# Altium PCB PCB_HW_.PcbDoc (part 2 of 2)
Units mm, origin at the board's own origin, x right, y up, seen from the top; angles counter-clockwise.
Board outline 140.28 x 161.54 mm, 2 copper layers (Top Layer, Bottom Layer); 173 components, 176 nets, 651 pads, 150 vias.
Unrouted connection lines stored in the file: 54.
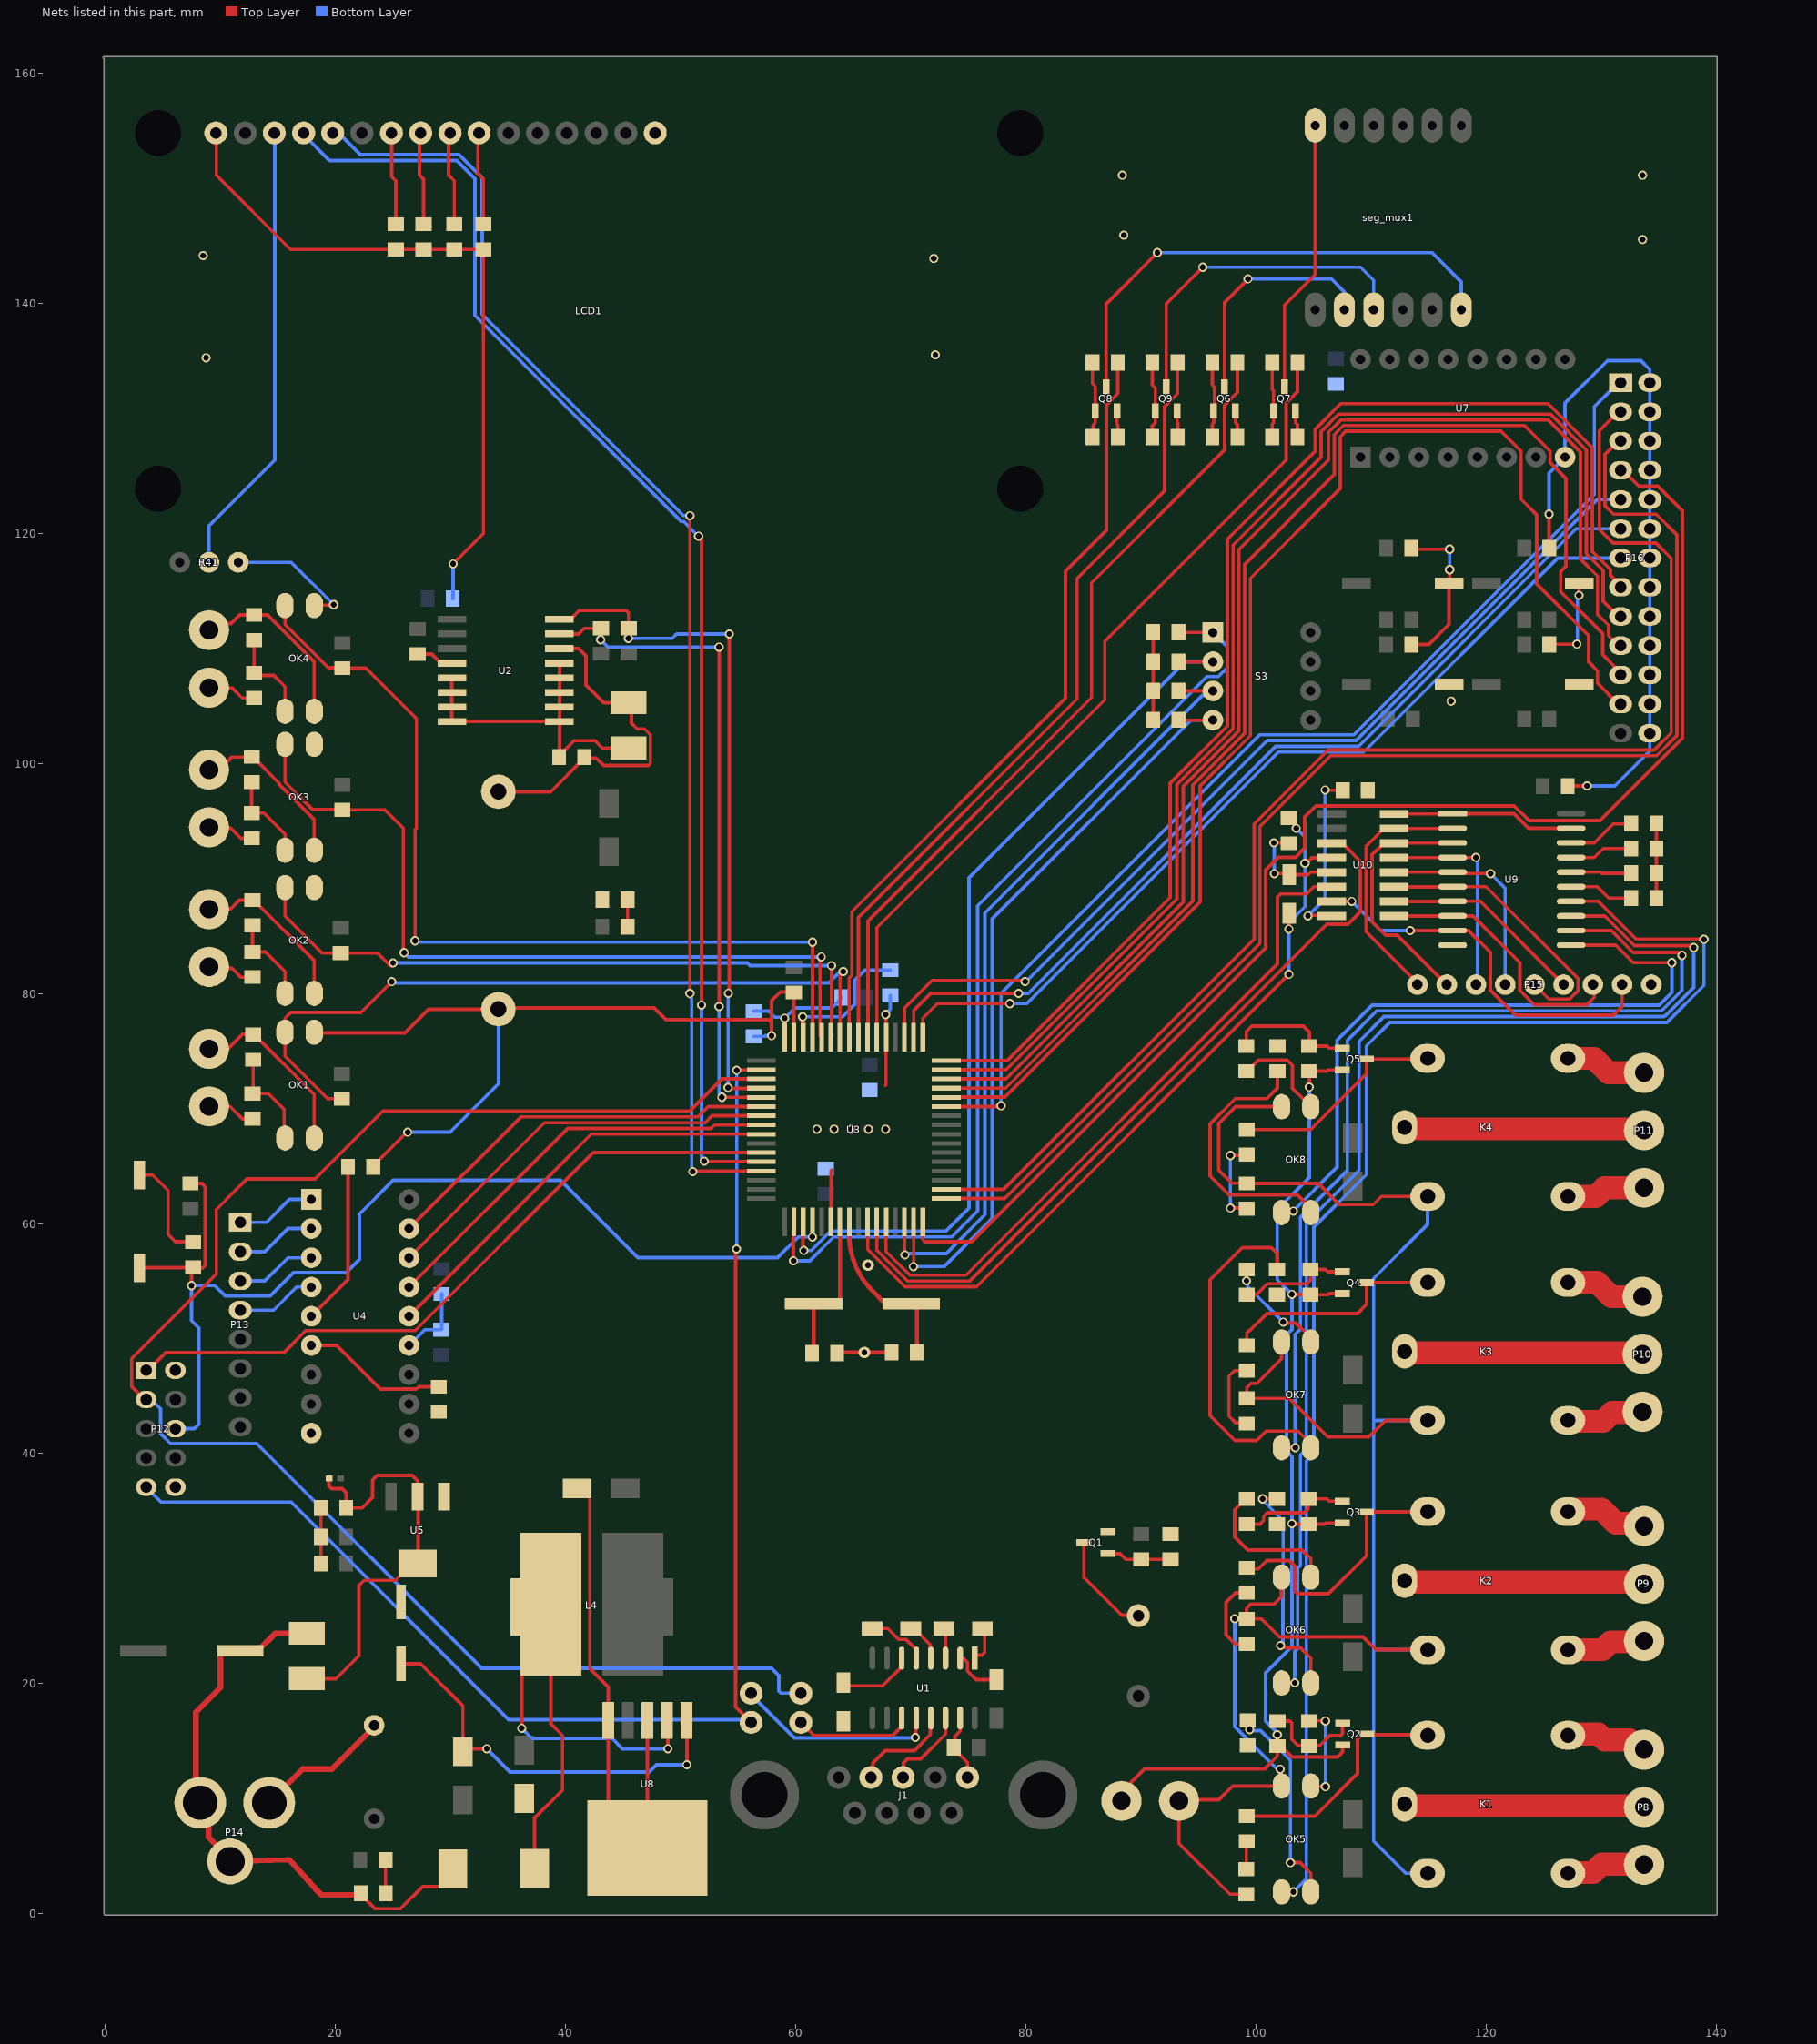
[diagram p2: the nets of this part, all layers, seen from the top]

## Via types
v1: diameter 0.8, hole 0.5, Top Layer to Bottom Layer, 146 vias
v2: diameter 1, hole 0.5, Top Layer to Bottom Layer, 4 vias

## Nets (pads, with @x,y where several pads share a name; then routed paths per layer and width w, separated by ;. In a path a pad name is that pad's centre, name@x,y a point inside that pad or via, vN(x,y) a via of type N, cw(c..) or ccw(c..) an arc to the next point about the centre after c; other vN are vias at no path point) (continued)
GND: BT1.2 C1.2 C5.1 C6.1 C7.2 C8.2 C9.1 C10.2 C11.2 C12.2 C13.2 C14.2 C15.1 C16.2 C17.2 C18.1 C19.1 C20.1 C21.1 C22.1 C23.2 C24.2 C25.2 C26.2 C27.2 C28.1 C29.1 C30.2 C31.2 C32.1 C33.1 D11.1 D13.1 D16.2 D18.1 J1.5 LCD1.1 LCD1.16 OK1.3 OK2.3 OK3.3 OK4.3 P12.2 P12.10 P14.1 P15.1 P16.2 P16.4 P16.6 P16.8 P16.10 P16.12 P16.14 P16.16 P16.18 P16.20 P16.22 P16.24 P16.26 pad.11 pad.12 pad.13 pad.14 pad.15 pad.16 pad.17 pad.18 pad.19 pad.20 pad.21 pad.22 pad.23 pad.24 Q1.2 Q6.2 Q7.2 Q8.2 Q9.2 R8.1 R26.1 R27.1 R30.1 R33.1 R35.1 R37.1 R38.1 R39.1 R40.1 R41.1 R46.1 R47.1 R48.1 R49.1 R52.1 R53.1 R59.1 R60.1 R61.2 S1.1 S2.1 S4.1 S5.1 S6.1 U1.15 U2.5 U2.6 U2.7 U2.8 U2.9 U2.10 U2.11 U2.12 U2.13 U3.22 U3.53 U3.63 U4.9 U4.13 U5.1 U7.8 U8.3 U8.5 U9.1 U9.10 U9.19 U10.8 U10.13 | length 437
  Top Layer w0.3: S1.1@2.972,64.211 4.115,64.211 5.461,62.865 5.461,59.055 6.096,58.42 7.62,58.42 C15.1@7.645,58.395 ; LCD1.1@9.616,154.806 9.652,154.77 9.652,151.13 16.104,144.678 R38.1@25.248,144.678 R39.1@27.661,144.678 R37.1@30.328,144.678 R40.1@32.868,144.678 32.868,119.99 v1(30.226,117.348) ; OK1.3@18.161,76.637 18.217,76.581 26.035,76.581 28.09,78.636 BT1.2@34.163,78.636 34.267,78.74 47.707,78.74 48.723,77.724 57.658,77.724 57.785,77.597 57.912,77.597 ; OK4.3@18.161,113.721 18.196,113.756 19.814,113.756 v1(19.849,113.792) ; C25.2@18.745,30.455 C26.2@18.745,32.766 C24.2@18.745,35.281 ; D16.2@22.073,1.651 22.227,1.651 23.428,0.45 25.659,0.45 27.571,2.362 29.101,2.362 30.201,3.462 D18.1@30.201,3.912 ; C10.2@23.292,64.922 23.292,65.022 26.214,67.945 v1(26.289,67.945) ; U2.5@30.121,107.442 U2.6@30.121,106.172 U2.7@30.121,104.902 U2.8@30.121,103.632 U2.9@39.475,103.632 ; C7.2@39.446,100.559 39.475,100.587 C7.2@39.475,100.687 ; U2.13@39.475,108.712 U2.12@39.475,107.442 U2.11@39.475,106.172 U2.10@39.475,104.902 U2.9@39.475,103.632 ; D13.1@41.021,36.957 41.421,36.957 42.121,36.257 42.121,21.305 43.717,19.709 U8.5@43.717,16.816 U8.3@43.717,8.128 ; C8.2@45.466,101.346 43.18,101.346 42.545,101.981 40.769,101.981 C7.2@39.475,100.687 ; U8.3@47.117,5.715 U8.3@47.117,16.816 ; v1(57.912,76.327) 57.912,77.597 ; U3.63@59.856,76.2 59.856,80.073 C14.2@59.842,80.086 59.792,80.137 58.674,80.137 57.912,79.375 57.912,77.597 ; U3.22@63.056,60.138 63.08,60.162 63.08,64.604 63.119,64.643 ; 67.818,72.009 67.856,72.047 U3.53@67.856,76.2 67.856,78.131 v1(67.818,78.168) ; U1.15@74.295,16.891 74.295,15.875 73.847,15.427 73.847,14.563 C1.2@73.736,14.453 73.736,14.353 74.93,13.159 74.93,11.859 J1.5@74.939,11.85 ; Q8.2@87.945,130.649 87.945,129.479 88.011,129.413 88.011,128.397 R59.1@87.986,128.372 ; R49.1@91.084,103.784 R48.1@91.084,106.324 R47.1@91.084,108.864 R46.1@91.084,111.404 ; Q9.2@93.152,130.649 93.152,129.606 93.218,129.54 93.218,128.397 R60.1@93.193,128.372 ; Q6.2@98.232,130.649 98.232,129.606 98.4,129.438 R52.1@98.4,128.372 ; v1(101.563,93.091) 102.845,93.091 R61.2@102.87,93.066 ; v1(101.6,90.424) 102.794,90.424 C27.2@102.895,90.322 104.546,90.322 104.775,90.551 106.586,90.551 U10.13@106.606,90.531 ; Q7.2@103.439,130.649 103.439,129.606 103.607,129.438 R53.1@103.607,128.372 ; U10.8@112.014,95.611 U9.1@117.094,95.611 ; C18.1@113.513,110.338 115.037,110.338 116.789,112.09 S5.1@116.789,115.646 116.84,115.697 v1(116.84,116.84) ; C20.1@113.513,118.72 113.614,118.618 v1(116.84,118.618) ; U9.1@117.094,95.631 122.428,95.631 123.698,94.361 U9.19@127.394,94.361 ; v1(125.476,121.666) 125.476,118.745 C21.1@125.501,118.72 ; C19.1@125.501,110.338 125.527,110.363 v1(127.889,110.363) ; C22.1@127.102,98.019 127.127,98.044 v1(128.778,98.044) ; v1(128.074,114.612) 128.074,115.628 S6.1@128.092,115.646 ; C7.2@39.475,100.687 U2.9@39.475,103.632
  Top Layer w0.381: C28.1@63.602,48.743 63.602,48.793 v2(65.977,48.793) C32.1@68.351,48.793
  Top Layer w0.5: C23.2@17.524,24.375 14.775,24.375 13.26,22.86 C31.2@11.76,22.86 10.26,22.86 10.01,22.61 10.01,19.662 7.874,17.526 7.874,10.033 P14.1@8.255,9.652 8.975,8.932 8.975,6.652 10.855,4.772 P14.1@10.855,4.552 15.772,4.692 15.779,4.693 15.993,4.693 16.148,4.537 18.415,2.032 18.796,1.651 D16.2@22.073,1.651
  Bottom Layer w0.3: R41.1@11.557,117.475 16.166,117.475 v1(19.849,113.792) ; v1(26.289,67.945) 29.972,67.945 34.163,72.136 BT1.2@34.163,78.636 ; U4.13@26.407,49.403 27.779,50.775 R35.1@29.185,50.775 29.235,50.825 C9.1@29.235,53.873 ; C6.1@30.201,114.325 30.226,114.351 v1(30.226,117.348) ; C16.2@56.363,76.276 57.353,76.276 57.404,76.327 v1(57.912,76.327) ; v1(67.818,78.168) 67.818,78.232 68.224,78.638 C17.2@68.224,79.832 ; v1(101.563,93.091) 101.6,93.054 v1(101.6,90.424) ; v1(116.84,116.84) v1(116.84,118.618) ; v1(125.476,121.666) 125.476,125.222 U7.8@126.873,126.619 126.873,131.318 130.556,135.001 133.477,135.001 134.239,134.239 P16.2@134.239,133.096 P16.4@134.239,130.556 P16.6@134.239,128.016 P16.8@134.239,125.476 P16.10@134.239,122.936 P16.12@134.239,120.396 P16.14@134.239,117.856 P16.16@134.239,115.316 P16.18@134.239,112.776 P16.20@134.239,110.236 P16.22@134.239,107.696 P16.24@134.239,105.156 P16.26@134.239,102.616 134.239,101.092 131.191,98.044 v1(128.778,98.044) ; v1(127.889,110.363) 127.949,110.423 127.949,114.487 v1(128.074,114.612)
  other v2: 66.294,56.388
GNDX: P7.1 Q2.2 Q3.2 Q4.2 Q5.2 R28.1 R29.1 R32.1 R34.1 | length 97.2
  Top Layer w0.3: P7.1@88.318,9.812 88.318,10.594 90.297,12.573 100.734,12.573 101.854,13.693 R28.1@101.854,14.548 ; v1(101.854,15.558) R28.1@101.854,14.548 ; v1(103.129,33.909) 103.16,33.878 R29.1@104.589,33.878 104.603,33.864 105.934,33.864 106.045,33.975 Q3.2@107.501,33.975 ; v1(103.129,53.848) 104.718,53.848 R32.1@104.75,53.817 106.268,53.817 106.365,53.914 Q4.2@107.501,53.914 ; v1(104.638,71.853) 104.638,73.232 R34.1@104.623,73.248 106.141,73.248 106.238,73.345 Q5.2@107.501,73.345 ; Q2.2@107.535,14.671 107.535,14.063 107.096,13.624 103.128,13.624 102.203,14.548 R28.1@101.854,14.548
  Bottom Layer w0.3: v1(101.854,15.558) 101.758,15.654 101.758,15.844 100.838,16.764 100.838,20.955 103.129,23.246 v1(103.129,33.909) 103.129,39.749 102.675,40.202 102.675,50.34 103.129,50.794 v1(103.129,53.848) 101.854,55.123 101.854,61.214 104.638,63.998 v1(104.638,71.853)
IN_1: OK4.4 R12.2 U3.61 | length 78.6
  Top Layer w0.3: OK4.4@15.621,113.721 15.621,112.086 19.376,108.331 20.549,108.331 R12.2@20.599,108.28 22.657,108.28 27.051,103.886 27.051,94.365 26.924,94.238 v1(26.924,84.582) ; U3.61@61.456,76.2 61.456,84.443 v1(61.468,84.455)
  Bottom Layer w0.3: v1@26.924,84.455 v1(61.468,84.455)
IN_2: OK3.4 R9.2 U3.60 | length 69.6
  Top Layer w0.3: OK3.4@15.621,101.656 15.621,98.37 17.979,96.012 20.549,96.012 R9.2@20.599,95.961 24.308,95.961 25.908,94.361 25.908,83.611 v1(25.971,83.548) ; v1(62.23,83.185) 62.115,83.07 62.115,76.341 U3.60@62.256,76.2
  Bottom Layer w0.3: v1(25.971,83.548) 26.334,83.185 v1(62.23,83.185)
IN_3: OK2.4 R4.2 U3.59 | length 58.3
  Top Layer w0.3: OK2.4@15.621,89.21 15.621,86.741 18.847,83.515 R4.2@20.472,83.515 23.673,83.515 24.754,82.434 24.923,82.434 25.019,82.53 v1(25.019,82.665) ; U3.59@63.056,76.2 63.119,76.263 v1(63.119,82.423)
  Bottom Layer w0.3: v1(25.019,82.665) 55.81,82.665 56.052,82.423 v1(63.119,82.423)
IN_4: OK1.4 R1.2 U3.58 | length 65.9
  Top Layer w0.3: R1.2@20.574,70.841 20.549,70.866 19.304,70.866 15.621,74.549 OK1.4@15.621,76.637 15.621,77.851 16.129,78.359 22.225,78.359 v1(24.892,81.026) ; U3.58@63.856,76.2 63.863,76.207 63.863,81.643 v1(64.135,81.915)
  Bottom Layer w0.3: v1(24.892,81.026) 25.007,80.911 62.877,80.911 63.881,81.915 v1(64.135,81.915)
"K A": U3.6 U4.17 | length 35
  Top Layer w0.3: U4.17@26.407,59.563 36.113,69.269 51.489,69.269 52.389,70.169 U3.6@57.025,70.169
"K B": U3.7 U4.16 | length 35.7
  Top Layer w0.3: U4.16@26.407,57.023 38.153,68.769 52.132,68.769 52.732,69.369 U3.7@57.025,69.369
"K C": U3.8 U4.15 | length 36.5
  Top Layer w0.3: U4.15@26.407,54.483 40.193,68.269 52.648,68.269 52.948,68.569 U3.8@57.025,68.569
"K D": U3.9 U4.14 | length 37.2
  Top Layer w0.3: U4.14@26.407,51.943 39.014,64.55 42.233,67.769 U3.9@57.025,67.769
MISO: P2.1 P12.3 U3.3 | length 141.8
  Top Layer w0.3: P12.3@3.556,44.704 3.406,44.704 2.306,45.804 2.306,48.28 9.652,55.626 9.652,61.214 11.303,62.865 11.303,62.87 12.314,63.881 18.233,63.881 24.121,69.769 50.801,69.769 53.601,72.569 U3.3@57.025,72.569
  Bottom Layer w0.3: P12.3@3.556,44.704 3.989,44.704 4.806,43.887 4.806,41.748 5.66,40.894 13.163,40.894 32.721,21.336 57.912,21.336 58.547,20.701 58.547,19.353 58.723,19.177 P2.1@60.452,19.177
MOSI: P3.2 P12.9 U3.2 | length 120.5
  Top Layer w0.3: v1(54.864,57.785) 54.784,57.705 54.784,17.987 P3.2@56.134,16.637 ; v1(54.878,73.319) 54.903,73.344 57,73.344 U3.2@57.025,73.369
  Bottom Layer w0.3: P12.9@3.556,37.084 4.852,35.788 16.155,35.788 35.064,16.879 55.892,16.879 P3.2@56.134,16.637 ; v1(54.864,57.785) 54.878,57.799 v1(54.878,73.319)
NetBT1_1: BT1.1 C7.1 C8.1 U2.14 | length 30.8
  Top Layer w0.3: BT1.1@34.163,97.536 38.708,97.536 41.631,100.459 C7.1@41.631,100.559 41.732,100.457 42.672,100.457 43.307,99.822 47.195,99.822 47.371,99.998 47.371,102.486 46.859,102.998 46.227,102.998 45.72,103.505 45.72,105.029 C8.1@45.466,105.283 43.307,105.283 41.783,106.807 41.783,109.347 41.148,109.982 U2.14@39.475,109.982
NetC2_1: C2.1 U1.2 | length 4.4
  Top Layer w0.3: U1.2@74.295,22.218 74.302,22.225 74.549,22.225 74.93,21.844 74.93,21.108 75.693,20.345 C2.1@77.445,20.345
NetC3_1: C3.1 U1.1 | length 3.3
  Top Layer w0.3: U1.1@75.565,22.218 75.565,22.379 75.665,22.479 76.2,22.479 76.431,22.71 76.431,24.585 C3.1@76.225,24.79
NetC3_2: C3.2 U1.3 | length 2.6
  Top Layer w0.3: C3.2@72.873,24.79 73.025,24.638 U1.3@73.025,22.218
NetC4_1: C4.1 U1.4 | length 3.5
  Top Layer w0.3: C4.1@70.002,24.79 70.302,24.79 71.717,23.376 71.717,22.256 U1.4@71.755,22.218
NetC4_2: C4.2 U1.5 | length 5.3
  Top Layer w0.3: C4.2@66.65,24.79 68.007,24.79 68.957,23.84 69.613,23.84 70.485,22.968 U1.5@70.485,22.218
NetC5_2: C5.2 U1.6 | length 6.6
  Top Layer w0.3: C5.2@64.16,20.091 64.44,19.812 67.559,19.812 69.215,21.468 U1.6@69.215,22.218
NetC10_1: C10.1 U4.5 | length 14.3
  Top Layer w0.3: U4.5@17.907,51.943 21.107,55.143 C10.1@21.107,64.922
NetC11_1: C11.1 U4.6 | length 12.7
  Top Layer w0.3: U4.6@17.907,49.403 20.111,49.403 23.901,45.613 27.056,45.613 27.265,45.822 C11.1@28.981,45.822
NetC16_1: C16.1 L2.2 U3.64 | length 10.3
  Top Layer w0.3: U3.64@59.056,76.2 v1(59.055,77.851)
  Bottom Layer w0.3: C16.1@56.363,78.461 57.683,78.461 58.205,77.939 58.967,77.939 v1(59.055,77.851) 59.944,78.74 63.143,78.74 63.957,79.554 L2.2@63.957,79.654
NetC17_1: C17.1 U3.62 | length 12.3
  Top Layer w0.3: v1(60.606,77.978) 60.631,77.953 60.631,76.225 U3.62@60.656,76.2
  Bottom Layer w0.3: v1(60.606,77.978) 64.076,77.978 65.151,79.053 65.151,81.153 66.015,82.017 C17.1@68.224,82.017
NetC23_1: C23.1 C24.1 L3.1 U5.2 | length 36.7
  Top Layer w0.3: C23.1@17.524,20.438 20.057,20.438 22.045,22.426 22.045,28.522 22.507,28.984 25.23,28.984 26.697,30.451 U5.2@27.147,30.451 27.178,30.482 27.178,36.22 U5.2@27.147,36.251 27.147,37.623 26.67,38.1 23.622,38.1 23.241,37.719 23.241,36.195 22.327,35.281 C24.1@20.93,35.281 20.93,36.601 20.574,36.957 19.685,36.957 19.447,37.195 L3.1@19.447,37.846
NetC28_2: C28.2 U3.23 Y1.1 | length 13.5
  Top Layer w0.381: C28.2@61.417,48.743 ccw(c61.049,49.111) 61.57,49.111 Y1.1@61.57,53.035 63.546,53.035 63.856,53.345 U3.23@63.856,60.138
NetC30_1: C30.1 D17.2 U8.1 | length 35.4
  Top Layer w0.3: C30.1@25.705,21.742 27.407,21.742 31.09,18.059 D17.2@31.09,14.097 31.34,14.347 v1(33.161,14.347) ; U8.1@50.517,16.816 50.546,16.787 v1(50.546,12.954)
  Bottom Layer w0.3: v1(33.161,14.347) 35.177,12.331 47.281,12.331 47.904,12.954 v1(50.546,12.954)
NetC32_2: C32.2 U3.24 Y1.2 | length 14.8
  Top Layer w0.381: U3.24@64.656,60.138 64.656,59.055 ccw(c71.606,59.055) 66.692,54.141 67.635,53.198 67.746,53.086 69.467,53.086 69.469,53.086 cw(c69.469,52.69) 69.493,53.085 cw(c69.469,52.69) 69.545,53.079 69.568,53.074 Y1.2@69.763,53.155 ; Y1.2@70.053,53.035 70.536,53.035 C32.2@70.536,48.793
NetD1_A: R15.1
NetD2_2: D2.2 R19.2 | length 2.4
  Top Layer w0.3: D2.2@99.162,3.886 99.162,6.248 R19.2@99.212,6.299
NetD3_2: D3.2 R20.2 | length 7.1
  Top Layer w0.3: D3.2@99.212,23.444 98.222,23.444 97.409,24.257 97.409,27.065 98.234,27.889 R20.2@99.212,27.889
NetD4_2: D4.2 R21.2 | length 7
  Top Layer w0.3: D4.2@99.212,42.621 99.153,42.681 98.238,42.681 97.663,43.256 97.663,46.736 98.146,47.219 R21.2@99.212,47.219
NetD5_A: K1.5 Q2.3 R19.1 | length 20.5
  Top Layer w0.3: R19.1@99.212,8.484 105.131,8.484 108.839,12.192 108.839,15.175 109.285,15.621 Q2.3@109.635,15.621 109.685,15.571 114.877,15.571 K1.5@114.927,15.521
NetD6_A: K2.5 Q3.3 R20.1 | length 23.7
  Top Layer w0.3: R20.1@99.212,30.074 99.314,29.972 100.203,29.972 100.947,30.716 102.886,30.716 103.094,30.508 103.096,30.508 103.378,30.226 103.378,28.067 103.629,27.816 106.302,27.816 109.601,31.115 Q3.3@109.601,34.925 109.615,34.939 114.914,34.939 K2.5@114.927,34.952
NetD7_2: D7.2 R24.2 | length 7.5
  Top Layer w0.3: v1(97.79,61.341) 99.162,61.341 D7.2@99.212,61.29 ; v1(97.79,65.913) 99.136,65.913 R24.2@99.212,65.989
  Bottom Layer w0.3: v1(97.79,61.341) v1(97.79,65.913)
NetD8_A: K3.5 Q4.3 R21.1 | length 19.7
  Top Layer w0.3: R21.1@99.212,49.403 99.212,50.497 99.388,50.673 99.441,50.673 100.953,52.185 108.827,52.185 109.601,52.959 Q4.3@109.601,54.864 109.615,54.878 114.914,54.878 K3.5@114.927,54.891
NetD9_A: K4.5 Q5.3 R24.1 | length 19
  Top Layer w0.3: R24.1@99.212,68.174 104.75,68.174 109.601,73.025 Q5.3@109.601,74.295 114.865,74.295 K4.5@114.927,74.357
NetD10_1: D10.1 U9.18 | length 5.9
  Top Layer w0.3: U9.18@127.394,93.091 129.413,93.091 131.064,94.742 132.588,94.742 D10.1@132.613,94.767
NetD10_2: D10.2 D12.2 D14.2 D15.2 | length 6.5
  Top Layer w0.3: D15.2@134.798,88.29 D14.2@134.798,90.449 D12.2@134.798,92.608 D10.2@134.798,94.767
NetD12_1: D12.1 U9.17 | length 5.6
  Top Layer w0.3: U9.17@127.432,91.783 U9.17@127.394,91.821 129.413,91.821 130.2,92.608 D12.1@132.613,92.608
NetD14_1: D14.1 U9.16 | length 5.3
  Top Layer w0.3: U9.16@127.394,90.551 129.946,90.551 130.048,90.449 D14.1@132.613,90.449
NetD15_1: D15.1 U9.15 | length 5.6
  Top Layer w0.3: U9.15@127.394,89.281 129.667,89.281 130.658,88.29 D15.1@132.613,88.29
NetD16_1: D16.1 R54.1 | length 2.9
  Top Layer w0.3: R54.1@24.359,4.674 24.359,1.803 D16.1@24.384,1.778
NetD18_2: D18.2 L4.1 U8.2 | length 50.9
  Top Layer w0.3: v1(36.195,16.129) L4.1@36.195,26.67 ; D18.2@37.313,3.937 37.313,8.327 39.739,10.753 39.739,15.506 38.735,16.51 L4.1@38.735,26.924 ; U8.2@48.817,16.816 48.895,16.738 v1(48.895,14.351)
  Bottom Layer w0.3: v1(36.195,16.129) 37.096,15.228 44.073,15.228 44.95,14.351 v1(48.895,14.351)
NetJ1_2: J1.2 U1.13 | length 8.8
  Top Layer w0.3: J1.2@66.539,11.85 66.717,12.028 66.717,13.123 67.783,14.189 70.323,14.189 71.717,15.583 71.717,16.98 U1.13@71.755,17.018
NetJ1_3: J1.3 U1.14 | length 7.4
  Top Layer w0.3: J1.3@69.339,11.85 69.385,11.896 69.385,13.124 69.723,13.462 70.866,13.462 73.025,15.621 U1.14@73.025,17.018
NetK1_1: K1.1 P8.2 | length 20.9
  Top Layer w2: K1.1@112.927,9.521 112.927,9.488 113.019,9.396 133.606,9.396 P8.2@133.731,9.271
NetK1_2: K1.2 P8.1 | length 6.8
  Top Layer w2: K1.2@127.127,15.521 127.223,15.617 127.826,15.617 127.831,15.621 129.794,15.621 130.302,15.113 132.483,15.113 133.038,14.558 P8.1@133.444,14.558
NetK1_3: K1.3 P8.3 | length 7
  Top Layer w2: K1.3@127.127,3.521 127.195,3.589 129.319,3.589 130.048,4.318 133.278,4.318 133.325,4.271 P8.3@133.731,4.271
NetK2_1: K2.1 P9.2 | length 20.9
  Top Layer w2: K2.1@112.927,28.952 112.927,28.919 113.019,28.827 133.606,28.827 P9.2@133.731,28.702
NetK2_2: K2.2 P9.1 | length 7.3
  Top Layer w2: K2.2@127.127,34.952 127.223,35.048 127.826,35.048 127.958,35.179 130.048,35.179 131.269,33.958 133.475,33.958 P9.1@133.731,33.702
NetK2_3: K2.3 P9.3 | length 6.9
  Top Layer w2: K2.3@127.127,22.952 130.14,22.952 130.825,23.637 133.666,23.637 P9.3@133.731,23.702
NetK3_1: K3.1 P10.2 | length 20.8
  Top Layer w2: K3.1@112.927,48.891 112.927,48.858 113.019,48.766 133.479,48.766 P10.2@133.604,48.641
NetK3_2: K3.2 P10.1 | length 7
  Top Layer w2: K3.2@127.127,54.891 129.64,54.891 130.888,53.643 133.602,53.643 P10.1@133.604,53.641
NetK3_3: K3.3 P10.3 | length 6.9
  Top Layer w2: K3.3@127.127,42.891 127.219,42.799 130.175,42.799 130.952,43.576 133.539,43.576 P10.3@133.604,43.641
NetK4_1: K4.1 P11.2 | length 20.9
  Top Layer w2: K4.1@112.927,68.357 112.927,68.324 113.019,68.232 133.606,68.232 P11.2@133.731,68.107
NetK4_2: K4.2 P11.1 | length 7.1
  Top Layer w2: K4.2@127.127,74.357 127.131,74.361 129.391,74.361 130.645,73.107 P11.1@133.731,73.107
NetK4_3: K4.3 P11.3 | length 6.9
  Top Layer w2: K4.3@127.127,62.357 129.54,62.357 130.29,63.107 P11.3@133.731,63.107
NetL1_1: L1.1 R15.2 | length 2.4
  Top Layer w0.3: L1.1@45.39,85.813 45.39,88.161 R15.2@45.39,88.163 R15.2@45.39,88.163
NetLCD1_3: LCD1.3 R41.3 | length 39.7
  Bottom Layer w0.3: R41.3@9.017,117.475 9.017,120.65 14.732,126.365 14.732,154.765 LCD1.3@14.691,154.806
NetLCD1_7: LCD1.7 R38.2 | length 8.1
  Top Layer w0.3: LCD1.7@24.866,154.806 24.892,154.78 24.892,151.003 25.248,150.647 R38.2@25.248,146.863
NetLCD1_8: LCD1.8 R39.2 | length 8.1
  Top Layer w0.3: LCD1.8@27.416,154.806 27.305,154.695 27.305,151.13 27.661,150.774 R39.2@27.661,146.863
NetLCD1_9: LCD1.9 R37.2 | length 8.2
  Top Layer w0.3: LCD1.9@29.966,154.806 29.845,154.685 29.845,151.13 30.328,150.647 R37.2@30.328,146.863
NetLCD1_10: LCD1.10 R40.2 | length 8.2
  Top Layer w0.3: LCD1.10@32.491,154.806 32.385,154.7 32.385,151.257 32.868,150.774 R40.2@32.868,146.863
NetLS1_2: LS1.2 Q1.3 | length 9.1
  Top Layer w0.3: Q1.3@85.056,32.258 85.056,29.244 88.339,25.961 89.736,25.961 LS1.2@89.789,25.908
NetOK1_1: OK1.1 R2.2 R3.2 | length 8.8
  Top Layer w0.3: R3.2@12.852,74.244 12.852,71.349 R2.2@12.802,71.298 14.173,71.298 15.546,69.925 15.546,67.512 OK1.1@15.621,67.437
NetOK1_2: OK1.2 P1.1 R3.1 | length 15.6
  Top Layer w0.3: P1.1@9.017,75.184 10.668,75.184 11.938,76.454 12.927,76.454 18.161,71.22 OK1.2@18.161,67.437
NetOK2_1: OK2.1 R5.2 R7.2 | length 7.7
  Top Layer w0.3: R7.2@12.802,85.928 R5.2@12.802,83.617 13.919,83.617 15.621,81.915 OK2.1@15.621,80.01
NetOK2_2: OK2.2 P4.1 R7.1 | length 14.5
  Top Layer w0.3: P4.1@9.017,87.316 9.077,87.376 10.922,87.376 11.659,88.113 R7.1@12.802,88.113 12.902,88.113 18.161,82.853 OK2.2@18.161,80.01
NetOK3_1: OK3.1 R10.2 R11.2 | length 7.7
  Top Layer w0.3: R11.2@12.725,98.374 R10.2@12.725,95.682 13.792,95.682 15.621,93.853 OK3.1@15.621,92.456
NetOK3_2: OK3.2 P5.1 R11.1 | length 14.6
  Top Layer w0.3: P5.1@9.017,99.448 9.883,99.448 10.892,100.457 10.922,100.457 11.024,100.559 R11.1@12.725,100.559 12.825,100.559 15.121,98.263 15.121,98.163 18.161,95.123 OK3.2@18.161,92.456
NetOK4_1: OK4.1 R13.2 R14.2 | length 8.2
  Top Layer w0.3: R14.2@12.929,110.719 R13.2@12.929,107.874 13.166,107.636 14.665,107.636 15.621,106.68 OK4.1@15.621,104.521
NetOK4_2: OK4.2 P6.1 R14.1 | length 15.7
  Top Layer w0.3: P6.1@9.017,111.58 9.601,112.163 10.944,112.163 11.684,112.903 14.097,112.903 14.223,112.777 18.161,108.839 OK4.2@18.161,104.521
NetOK5_2: OK5.2 R26.2 | length 18.2
  Top Layer w0.3: R26.2@99.289,16.815 99.463,16.64 v1(99.463,16.024) ; v1(102.997,4.445) 103.858,4.445 104.775,3.528 OK5.2@104.775,1.905
  Bottom Layer w0.3: v1(99.463,16.024) 99.559,15.929 100.403,15.929 102.997,13.335 v1(102.997,4.445)
NetOK5_3: OK5.3 R22.1 | length 8.4
  Top Layer w0.3: R22.1@104.64,16.758 104.646,16.764 v1(106.045,16.764) ; OK5.3@104.775,11.105 104.803,11.077 106.017,11.077 v1(106.045,11.049)
  Bottom Layer w0.3: v1(106.045,11.049) v1(106.045,16.764)
NetOK6_2: OK6.2 R27.2 | length 20.1
  Top Layer w0.3: v1(100.584,36.068) 101.823,36.068 R27.2@101.829,36.062 ; v1(102.138,23.315) 102.273,23.315 102.443,23.145 102.712,23.145 102.743,23.114 103.886,23.114 104.775,22.225 OK6.2@104.775,20.066
  Bottom Layer w0.3: v1(100.584,36.068) 100.584,35.941 102.362,34.163 102.362,28.795 102.357,28.79 102.357,23.423 102.25,23.315 v1(102.138,23.315)
NetOK6_3: OK6.3 R23.1 | length 12.8
  Top Layer w0.3: R23.1@99.212,36.062 99.112,36.062 98.162,35.112 98.162,32.775 99.314,31.623 104.013,31.623 104.775,30.861 OK6.3@104.775,29.266
NetOK7_2: OK7.2 R30.2 | length 31.2
  Top Layer w0.3: R30.2@101.829,56.001 101.829,57.429 101.472,57.786 101.346,57.912 98.806,57.912 96.012,55.118 96.012,43.307 98.171,41.148 100.076,41.148 100.891,41.963 103.675,41.963 104.775,40.863 OK7.2@104.775,40.513
NetOK7_3: OK7.3 R25.1 | length 9.2
  Top Layer w0.3: v1(99.187,55.017) 99.187,55.976 R25.1@99.212,56.001 ; v1(102.379,51.435) 102.474,51.339 103.499,51.339 104.775,50.063 OK7.3@104.775,49.713
  Bottom Layer w0.3: v1(99.187,55.017) 99.283,54.921 99.283,54.531 v1(102.379,51.435)
NetOK8_2: OK8.2 R33.2 | length 23.5
  Top Layer w0.3: R33.2@101.779,73.248 R33.2@101.879,73.248 101.879,71.78 100.954,70.855 98.214,70.855 96.012,68.652 96.012,64.135 97.663,62.484 103.601,62.484 104.775,61.31 OK8.2@104.775,60.96
NetOK8_3: OK8.3 R31.1 | length 8.9
  Top Layer w0.3: R31.1@99.162,73.248 99.262,73.248 100.212,74.198 102.724,74.198 103.18,73.742 103.18,71.755 104.195,70.74 104.221,70.74 104.775,70.185 OK8.3@104.775,70.16
NetP1_2: P1.2 R2.1 | length 4.2
  Top Layer w0.3: P1.2@9.017,70.184 10.842,70.184 11.938,69.088 12.776,69.088 R2.1@12.802,69.113
NetP2_2: P2.2 U1.11 | length 10.3
  Top Layer w0.3: P2.2@60.452,16.637 61.6,15.489 68.436,15.489 69.215,16.268 U1.11@69.215,17.018
NetP3_1: P3.1 U1.12 | length 17.7
  Top Layer w0.3: v1(70.399,15.326) 70.447,15.373 70.447,16.98 U1.12@70.485,17.018
  Bottom Layer w0.3: P3.1@56.134,19.177 56.134,19.046 59.893,15.287 70.36,15.287 v1(70.399,15.326)
NetP4_2: P4.2 R5.1 | length 4.2
  Top Layer w0.3: P4.2@9.017,82.316 9.156,82.177 11.041,82.177 11.811,81.407 12.776,81.407 R5.1@12.802,81.432
NetP5_2: P5.2 R10.1 | length 4.2
  Top Layer w0.3: P5.2@9.017,94.448 9.104,94.361 10.922,94.361 11.786,93.497 R10.1@12.802,93.497
NetP6_2: P6.2 R13.1 | length 4.3
  Top Layer w0.3: P6.2@9.017,106.58 9.044,106.553 11.049,106.553 11.913,105.689 R13.1@12.929,105.689
NetP14_2: P14.2 S7.1 | length 12
  Top Layer w0.5: P14.2@14.255,9.652 17.176,12.573 19.685,12.573 23.368,16.256 S7.1@23.368,16.383
NetQ1_1: Q1.1 R6.2 R8.2 | length 5.6
  Top Layer w0.3: Q1.1@87.156,31.308 88.199,31.308 88.695,30.812 R8.2@92.578,30.812
NetQ2_1: Q2.1 R22.2 R28.2 | length 8.7
  Top Layer w0.3: R28.2@101.879,16.758 102.948,16.758 103.124,16.582 103.124,15.181 103.666,14.639 104.64,14.639 105.571,14.639 106.426,15.494 107.359,15.494 107.535,15.67 Q2.1@107.535,16.571
NetQ3_1: Q3.1 R23.2 R29.2 | length 9.9
  Top Layer w0.3: R23.2@99.212,33.878 100.362,33.878 100.673,34.188 100.673,34.517 101.004,34.848 104.19,34.848 104.521,35.179 104.521,35.994 R29.2@104.589,36.062 104.595,36.068 106.172,36.068 106.365,35.875 Q3.1@107.501,35.875
NetQ4_1: Q4.1 R25.2 R32.2 | length 9.8
  Top Layer w0.3: R25.2@99.212,53.817 99.244,53.848 100.076,53.848 100.518,54.29 100.518,54.301 100.984,54.767 104.424,54.767 104.75,55.093 R32.2@104.75,56.001 104.755,56.007 106.045,56.007 106.238,55.814 Q4.1@107.501,55.814
NetQ5_1: Q5.1 R31.2 R34.2 | length 11.3
  Top Layer w0.3: R31.2@99.162,75.432 99.162,76.683 99.646,77.167 104.14,77.167 104.648,76.659 104.648,75.458 R34.2@104.623,75.432 106.178,75.432 106.365,75.245 Q5.1@107.501,75.245
NetQ6_1: Q6.1 R50.2 R52.2 | length 6.6
  Top Layer w0.3: R52.2@96.215,128.372 96.215,129.489 96.332,129.606 Q6.1@96.332,130.649 96.393,130.71 96.393,132.715 96.215,132.893 R50.2@96.215,134.849
NetQ7_1: Q7.1 R51.2 R53.2 | length 6.6
  Top Layer w0.3: R53.2@101.422,128.372 101.422,129.489 101.539,129.606 101.539,132.395 101.422,132.512 R51.2@101.422,134.849
NetQ8_1: Q8.1 R57.2 R59.2 | length 6.7
  Top Layer w0.3: R59.2@85.801,128.372 85.852,128.422 85.852,129.413 86.045,129.606 Q8.1@86.045,130.649 86.045,132.776 85.801,133.02 R57.2@85.801,134.849
NetQ9_1: Q9.1 R58.2 R60.2 | length 6.7
  Top Layer w0.3: R60.2@91.008,128.372 91.008,129.362 91.252,129.606 91.252,132.649 91.008,132.893 R58.2@91.008,134.849
NetR18_1: R18.1 U2.4 | length 3.3
  Top Layer w0.3: R18.1@27.153,109.499 28.384,109.499 29.171,108.712 U2.4@30.121,108.712
OX1: P16.23 U3.44 | length 116.9
  Top Layer w0.3: U3.44@73.087,70.969 73.111,70.993 78.178,70.993 95.153,87.968 95.153,98.05 99.516,102.413 99.516,116.085 107.325,123.893 107.325,128.382 107.812,128.869 121.311,128.869 123.043,127.137 123.043,122.964 124.409,121.597 124.409,115.604 128.905,111.108 128.905,108.839 129.692,108.052 129.692,106.963 131.499,105.156 P16.23@131.699,105.156
OX2: P16.21 U3.45 | length 116.2
  Top Layer w0.3: U3.45@73.087,71.769 78.246,71.769 94.517,88.04 94.517,98.12 99.016,102.62 99.016,117.304 106.825,125.113 106.825,128.589 107.605,129.369 123.351,129.369 125.583,127.137 125.583,126.141 126.951,124.773 126.951,117.127 126.492,116.668 126.492,114.935 130.133,111.294 130.133,109.468 131.118,108.483 131.118,108.429 131.699,107.848 P16.21@131.699,107.696
OX3: P16.19 U3.46 | length 114.9
  Top Layer w0.3: U3.46@73.087,72.569 78.284,72.569 93.681,87.966 93.681,97.992 98.516,102.827 98.516,118.582 106.325,126.391 106.325,128.796 107.397,129.869 125.391,129.869 128.206,127.054 128.206,117.777 129.692,116.291 129.692,112.956 130.633,112.015 130.633,111.102 131.499,110.236 P16.19@131.699,110.236
OX4: P16.17 U3.47 | length 112.8
  Top Layer w0.3: U3.47@73.087,73.369 78.286,73.369 93.137,88.22 93.137,98.155 98.016,103.034 98.016,118.971 105.664,126.619 105.664,128.843 107.19,130.369 125.598,130.369 128.729,127.238 128.729,118.224 130.192,116.761 130.192,114.083 131.499,112.776 P16.17@131.699,112.776
OX5: P16.15 U3.48 | length 111
  Top Layer w0.3: U3.48@73.087,74.169 78.379,74.169 92.54,88.33 92.54,98.265 97.516,103.241 97.516,119.487 105.156,127.127 105.156,129.042 107.382,131.268 125.406,131.268 129.239,127.435 129.239,118.421 130.826,116.834 130.826,116.341 131.699,115.468 P16.15@131.699,115.316
OX6: P16.13 U3.49 | length 78.9
  Top Layer w0.3: U3.49@71.056,76.2 71.056,77.862 72.315,79.121 v1(78.613,79.121)
  Bottom Layer w0.3: v1(78.613,79.121) 80.082,79.121 101.95,100.989 109.371,100.989 126.238,117.856 P16.13@131.699,117.856
OX7: P16.11 U3.50 | length 81.1
  Top Layer w0.3: U3.50@70.256,76.2 70.256,78.511 71.755,80.01 v1(79.375,80.01)
  Bottom Layer w0.3: v1(79.375,80.01) 80.23,80.01 101.709,101.489 108.927,101.489 127.834,120.396 P16.11@131.699,120.396
OX8: P16.9 U3.51 | length 83.2
  Top Layer w0.3: U3.51@69.456,76.2 69.456,78.727 71.87,81.141 79.8,81.141 79.904,81.037 v1(79.939,81.037)
  Bottom Layer w0.3: v1(79.939,81.037) 80.016,81.114 80.11,81.114 100.985,101.989 108.72,101.989 129.667,122.936 P16.9@131.699,122.936
OX9: P16.7 U3.32 | length 119
  Top Layer w0.3: U3.32@71.056,60.138 71.056,58.596 71.232,58.42 75.311,58.42 100.85,83.959 100.85,90.735 101.959,91.844 103.443,91.844 104.255,92.656 104.255,95.355 105.211,96.311 122.455,96.311 123.735,95.031 129.895,95.031 137.089,102.225 137.089,121.912 134.915,124.086 133.289,124.086 131.899,125.476 P16.7@131.699,125.476
OX10: P16.5 U3.33 | length 117.2
  Top Layer w0.3: U3.33@73.087,62.169 78.166,62.169 100.35,84.353 100.35,94.525 106.495,100.67 134.826,100.67 136.589,102.433 136.589,119.872 134.795,121.666 131.074,121.666 130.349,122.391 130.349,126.866 131.499,128.016 P16.5@131.699,128.016
OX11: P16.3 U3.34 | length 118.9
  Top Layer w0.3: U3.34@73.087,62.969 78.082,62.969 99.85,84.737 99.85,94.732 106.288,101.17 134.619,101.17 136.089,102.64 136.089,117.832 134.764,119.157 131.043,119.157 129.849,120.351 129.849,128.906 131.499,130.556 P16.3@131.699,130.556
OX12: P16.1 U3.43 | length 94.8
  Top Layer w0.3: U3.43@73.087,70.169 v1@77.851,70.169
  Bottom Layer w0.3: v1(77.851,70.231) 77.851,80.01 100.33,102.489 108.513,102.489 129.414,123.391 129.414,131.011 130.849,132.446 131.499,133.096 P16.1@131.699,133.096
QA: P15.2 U9.9 U10.15 | length 33.5
  Top Layer w0.3: U10.15@106.606,87.991 106.616,88.001 108.321,88.001 v1(108.331,88.011) ; v1(113.411,85.471) 118.491,85.471 120.376,83.586 120.376,80.294 122.565,78.105 131.064,78.105 131.829,78.87 131.829,80.769 P15.2@131.826,80.772
  Bottom Layer w0.3: v1(108.331,88.011) 110.871,85.471 v1(113.411,85.471)
QB: P15.3 U9.8 U10.1 | length 23.4
  Top Layer w0.3: U10.1@112.014,86.721 112.024,86.731 117.084,86.731 U9.8@117.094,86.741 118.872,86.741 122.936,82.677 122.936,80.274 124.188,79.022 128.757,79.022 129.413,79.678 129.413,80.645 P15.3@129.286,80.772
QC: P15.4 U9.7 U10.2 | length 17.7
  Top Layer w0.3: U10.2@112.014,87.991 112.024,88.001 117.084,88.001 U9.7@117.094,88.011 119.507,88.011 P15.4@126.746,80.772
QD: P15.5 U9.6 U10.3 | length 24.9
  Top Layer w0.3: U10.3@112.014,89.261 112.024,89.271 117.084,89.271 U9.6@117.094,89.281 120.005,89.281 127.996,81.29 127.996,80.254 127.264,79.522 125.456,79.522 P15.5@124.206,80.772
QE: P15.6 U9.5 U10.4 | length 18.6
  Top Layer w0.3: U10.4@112.014,90.531 112.024,90.541 117.084,90.541 U9.5@117.094,90.551 117.221,90.424 v1(120.396,90.424)
  Bottom Layer w0.3: v1(120.396,90.424) 121.666,89.154 P15.6@121.666,80.772
QF: P15.7 U9.4 U10.5 | length 18.3
  Top Layer w0.3: U10.5@112.014,91.801 112.024,91.811 117.084,91.811 U9.4@117.094,91.821 v1(119.126,91.821)
  Bottom Layer w0.3: P15.7@119.126,80.772 119.253,80.899 119.253,91.694 v1(119.126,91.821)
QG: P15.8 U9.3 U10.6 | length 22
  Top Layer w0.3: P15.8@116.586,80.772 112.277,85.081 111.261,85.081 110.109,86.233 110.109,92.066 111.114,93.071 U10.6@112.014,93.071 112.024,93.081 117.084,93.081 U9.3@117.094,93.091
QH: P15.9 U9.2 U10.7 | length 22
  Top Layer w0.3: P15.9@114.046,80.772 114.046,80.899 109.581,85.364 109.581,92.808 111.114,94.341 U10.7@112.014,94.341 112.024,94.351 117.084,94.351 U9.2@117.094,94.361
R1: P13.1 U4.1 | length 7
  Bottom Layer w0.3: P13.1@11.735,60.096 13.995,60.096 16.002,62.103 U4.1@17.907,62.103
R2: P13.2 U4.2 | length 7
  Bottom Layer w0.3: P13.2@11.735,57.556 13.868,57.556 15.875,59.563 U4.2@17.907,59.563
R3: P13.3 U4.3 | length 7
  Bottom Layer w0.3: P13.3@11.735,55.016 13.868,55.016 15.875,57.023 U4.3@17.907,57.023
R4: P13.4 U4.4 | length 7
  Bottom Layer w0.3: P13.4@11.735,52.476 14.63,52.476 16.637,54.483 U4.4@17.907,54.483
RCLK: C27.1 R61.1 U3.26 U10.12 | length 70.3
  Top Layer w0.3: U3.26@66.256,60.138 66.279,60.115 66.279,57.738 69.506,54.511 75.72,54.511 v1(102.87,81.661) ; v1(102.87,85.598) 102.87,86.944 C27.1@102.895,86.97 ; R61.1@102.87,95.25 102.97,95.25 103.42,94.8 103.42,94.446 v1(103.505,94.361) ; v1(104.267,91.313) 104.402,91.313 104.89,91.801 U10.12@106.606,91.801
  Bottom Layer w0.3: v1(102.87,81.661) v1(102.87,85.598) 102.87,86.151 104.267,87.548 v1(104.267,91.313) 104.267,93.599 v1(103.505,94.361)
REL1: OK5.1 U9.14 | length 125.6
  Top Layer w0.3: OK5.1@102.235,1.905 v1(103.251,1.905) ; U9.14@127.394,88.011 129.756,88.011 133.029,84.738 138.909,84.738 v1(138.938,84.709)
  Bottom Layer w0.3: v1(103.251,1.905) 104.379,3.033 104.379,39.355 105.029,40.005 105.029,59.69 109.601,64.262 109.601,75.438 111.633,77.47 135.708,77.47 138.938,80.7 v1(138.938,84.709)
REL2: OK6.1 U9.13 | length 105.5
  Top Layer w0.3: OK6.1@102.235,20.066 v1(103.378,20.066) ; U9.13@127.394,86.741 130.319,86.741 132.886,84.174 137.863,84.174 v1(138.049,83.988)
  Bottom Layer w0.3: v1(103.378,20.066) 103.378,22.788 103.629,23.038 103.629,30.036 103.879,30.286 103.879,39.871 104.379,40.371 104.379,60.056 108.966,64.643 108.966,75.819 111.133,77.986 135.462,77.986 135.545,78.069 135.6,78.069 138.049,80.518 v1(138.049,83.988)
REL3: OK7.1 U9.12 | length 83
  Top Layer w0.3: OK7.1@102.235,40.513 v1(103.425,40.513) ; U9.12@127.394,85.471 130.882,85.471 132.779,83.574 136.771,83.574 v1(137.033,83.312)
  Bottom Layer w0.3: v1(103.425,40.513) 103.425,50.383 103.879,50.837 103.879,60.572 107.95,64.643 107.95,75.946 110.49,78.486 135.255,78.486 137.033,80.264 v1(137.033,83.312)
REL4: OK8.1 U9.11 | length 60.3
  Top Layer w0.3: OK8.1@102.235,60.96 102.298,61.023 103.188,61.023 v1(103.251,61.087) ; U9.11@127.394,84.201 131.269,84.201 132.793,82.677 v1(136.144,82.677)
  Bottom Layer w0.3: v1(103.251,61.087) 107.061,64.897 107.061,75.946 110.109,78.994 121.396,78.994 121.404,78.986 135.048,78.986 136.144,80.082 v1(136.144,82.677)
RESET: C15.2 P12.6 R36.1 S1.2 U3.20 | length 95.8
  Top Layer w0.3: S1.2@2.972,56.159 C15.2@7.595,56.159 ; R36.1@7.391,63.475 8.407,63.475 8.695,63.187 8.695,56.369 8.46,56.134 7.722,56.134 C15.2@7.645,56.21 C15.2@7.595,56.159 ; v1(7.493,54.61) 7.493,56.058 C15.2@7.595,56.159 ; v1(61.453,58.831) 61.456,58.834 U3.20@61.456,60.138
  Bottom Layer w0.3: P12.6@6.096,42.164 7.747,42.164 8.128,42.545 8.128,50.927 7.493,51.562 v1(7.493,54.61) 9.525,54.61 10.414,53.721 14.351,53.721 16.363,55.733 20.935,55.733 22.083,56.881 22.083,60.818 25.019,63.754 39.56,63.754 46.28,57.035 58.432,57.035 60.228,58.831 v1(61.453,58.831)
RS: LCD1.4 U3.12 | length 115.5
  Top Layer w0.3: v1(51.562,119.761) 51.562,119.626 51.816,119.372 v1(51.816,78.994) ; v1(52.049,65.419) 52.074,65.394 57,65.394 U3.12@57.025,65.369
  Bottom Layer w0.3: LCD1.4@17.241,154.806 17.241,154.646 19.479,152.408 30.55,152.408 32.139,150.819 32.139,138.939 50.039,121.039 50.252,121.039 51.53,119.761 v1(51.562,119.761) ; v1(51.816,78.994) 51.816,65.595 51.992,65.419 v1(52.049,65.419)
RW: LCD1.5 U3.13 | length 114.6
  Top Layer w0.3: v1(50.812,79.998) v1(50.812,121.539) ; v1(51.054,64.519) 51.104,64.569 U3.13@57.025,64.569
  Bottom Layer w0.3: LCD1.5@20.147,154.933 22.172,152.908 30.734,152.908 30.737,152.911 30.755,152.911 32.766,150.899 32.766,139.019 50.246,121.539 v1(50.812,121.539) ; v1(50.812,79.998) 50.908,79.903 50.908,79.615 50.974,79.549 50.974,64.599 v1(51.054,64.519)
s1: Q7.3 seg_mux1.12 | length 23.8
  Top Layer w0.3: Q7.3@102.489,132.749 102.489,139.827 105.156,142.494 seg_mux1.12@105.156,155.448
s2: Q6.3 seg_mux1.5 | length 20.6
  Top Layer w0.3: Q6.3@97.282,132.749 97.282,140.081 99.06,141.859 99.138,141.859 99.314,142.035 v1(99.314,142.113)
  Bottom Layer w0.3: v1(99.314,142.113) 106.553,142.113 107.696,140.97 seg_mux1.5@107.696,139.446
s3: Q9.3 seg_mux1.4 | length 29.6
  Top Layer w0.3: Q9.3@92.202,132.749 92.202,139.954 v1(95.377,143.129)
  Bottom Layer w0.3: v1(95.377,143.129) 109.093,143.129 110.236,141.986 seg_mux1.4@110.236,139.446
s4: Q8.3 seg_mux1.1 | length 43.4
  Top Layer w0.3: Q8.3@86.995,132.749 86.995,139.954 v1(91.44,144.399)
  Bottom Layer w0.3: v1(91.44,144.399) 115.316,144.399 117.856,141.859 seg_mux1.1@117.856,139.446
SCK: P12.1 U3.11 | length 61.3
  Top Layer w0.3: P12.1@3.556,47.244 3.706,47.244 5.248,48.786 15.523,48.786 17.429,50.693 26.925,50.693 42.401,66.169 U3.11@57.025,66.169
SCL: R16.1 U2.16 U3.4 | length 60
  Top Layer w0.3: U2.16@39.475,112.522 40.425,112.522 41.187,113.284 45.29,113.284 45.466,113.108 45.466,111.76 R16.1@45.491,111.735 45.466,111.709 v1(45.466,110.871) ; v1(54.128,71.819) 54.292,71.819 54.367,71.744 57,71.744 U3.4@57.025,71.769 ; v1(54.146,80.026) 54.229,80.108 v1(54.229,111.252)
  Bottom Layer w0.3: v1(45.466,110.871) 49.276,110.871 49.657,111.252 v1(54.229,111.252) ; v1(54.128,71.819) 54.128,80.007 v1(54.146,80.026)
SDA: R17.1 U2.15 U3.5 | length 58
  Top Layer w0.3: U2.15@39.475,111.252 41.148,111.252 41.631,111.735 R17.1@43.078,111.735 43.053,111.709 v1(43.053,110.75) ; v1(53.34,78.867) 53.362,78.889 53.362,110.093 v1@53.378,110.109 ; v1(53.585,70.979) 53.59,70.974 57.02,70.974 U3.5@57.025,70.969
  Bottom Layer w0.3: v1(43.053,110.75) 43.682,110.121 53.328,110.121 v1(53.34,110.109) ; v1(53.34,78.867) 53.34,71.247 53.585,71.002 v1(53.585,70.979)
SER: U3.28 U10.14 | length 59.5
  Top Layer w0.3: U3.28@67.856,60.138 67.856,57.575 69.92,55.511 74.815,55.511 101.879,82.575 101.879,88.369 102.157,88.646 104.394,88.646 105.029,89.281 U10.14@106.606,89.281
so1: R51.1 U3.54 | length 73.8
  Top Layer w0.3: U3.54@67.056,76.2 67.056,85.725 86.868,105.537 86.868,110.617 102.616,126.365 102.616,131.318 103.607,132.309 R51.1@103.607,134.849
so2: R50.1 U3.55 | length 72
  Top Layer w0.3: U3.55@66.256,76.2 66.294,76.238 66.294,86.293 85.725,105.724 85.725,115.697 97.282,127.254 97.282,131.144 98.4,132.262 R50.1@98.4,134.849
so3: R58.1 U3.56 | length 70.1
  Top Layer w0.3: U3.56@65.456,76.2 65.456,86.614 84.455,105.613 84.455,116.078 92.075,123.698 92.075,131.017 93.193,132.135 R58.1@93.193,134.849
so4: R57.1 U3.57 | length 68.3
  Top Layer w0.3: U3.57@64.656,76.2 64.643,76.213 64.643,81.362 64.885,81.604 64.885,87.11 83.439,105.664 83.439,116.713 87.036,120.31 87.036,131.185 87.986,132.135 R57.1@87.986,134.849
SRCLK: U3.27 U10.11 | length 65.5
  Top Layer w0.3: U3.27@67.056,60.138 67.056,57.668 69.713,55.011 75.159,55.011 106.169,86.021 108.001,86.021 109.081,87.101 109.081,91.496 U10.11@107.486,93.091
SW1: R46.2 S3.1 U3.18 | length 84.6
  Top Layer w0.3: v1(59.817,56.769) 59.817,60.099 U3.18@59.856,60.138 ; R46.2@93.269,111.404 93.294,111.379 S3.1@96.266,111.379
  Bottom Layer w0.3: v1(59.817,56.769) 61.238,56.769 63.312,58.842 73.574,58.842 75.819,61.087 75.819,87.62 95.748,107.549 96.744,107.549 97.516,108.321 97.516,110.129 S3.1@96.266,111.379
SW2: R47.2 S3.2 U3.19 | length 79
  Top Layer w0.3: U3.19@60.656,60.138 60.628,60.11 60.628,57.736 v1(60.706,57.658) ; R47.2@93.345,108.864 93.37,108.839 S3.2@96.266,108.839
  Bottom Layer w0.3: v1(60.706,57.658) 61.341,57.658 63.025,59.342 73.058,59.342 75.057,61.341 75.057,90.043 93.853,108.839 S3.2@96.266,108.839
SW3: R48.2 S3.3 U3.30 | length 68.2
  Top Layer w0.3: U3.30@69.456,60.138 69.469,60.125 69.469,57.314 v1(69.506,57.277) ; R48.2@93.396,106.324 93.421,106.299 S3.3@96.266,106.299
  Bottom Layer w0.3: v1(69.506,57.277) 69.602,57.373 69.9,57.373 69.932,57.404 73.08,57.404 76.454,60.778 76.454,86.995 95.357,105.898 95.46,105.898 95.86,106.299 S3.3@96.266,106.299
SW4: R49.2 S3.4 U3.31 | length 67.9
  Top Layer w0.3: v1(70.231,56.261) 70.256,56.286 U3.31@70.256,60.138 ; R49.2@93.269,103.784 93.294,103.759 S3.4@96.266,103.759
  Bottom Layer w0.3: v1(70.231,56.261) 72.898,56.261 77.089,60.452 77.089,86.487 94.361,103.759 S3.4@96.266,103.759
VCC: C33.2 U10.16 | length 15.3
  Top Layer w0.3: v1(104.521,86.741) 104.575,86.795 106.532,86.795 U10.16@106.606,86.721 ; v1(106.013,97.695) 106.045,97.663 C33.2@107.544,97.663
  Bottom Layer w0.3: v1(104.521,86.741) 106.013,88.233 v1(106.013,97.695)
VX: D2.1 D3.1 D4.1 D7.1 K1.4 K2.4 K3.4 K4.4 OK5.4 OK6.4 OK7.4 OK8.4 P7.2 | length 188.7
  Top Layer w0.3: v1(98.159,25.654) D3.1@99.187,25.654 ; D2.1@99.162,1.702 97.739,1.702 93.318,6.123 P7.2@93.318,9.812 93.412,9.906 96.774,9.906 97.973,11.105 OK5.4@102.235,11.105 102.171,11.168 102.171,12.509 v1(102.108,12.573) ; OK6.4@102.235,29.266 102.235,27.559 101.615,26.939 99.583,26.939 99.187,26.543 D3.1@99.187,25.654 ; OK7.4@102.235,49.713 102.235,48.237 100.107,46.11 99.577,46.11 99.212,45.745 D4.1@99.212,44.806 102.895,44.806 106.248,41.453 109.83,41.453 111.268,42.891 K3.4@114.927,42.891 ; OK8.4@102.235,70.16 98.227,70.16 96.771,68.704 96.771,68.456 96.774,68.453 96.774,64.643 97.917,63.5 99.187,63.5 D7.1@99.212,63.475 105.435,63.475 107.264,61.646 110.194,61.646 110.905,62.357 K4.4@114.927,62.357 ; K2.4@114.927,22.952 110.428,22.952 109.314,24.065 102.046,24.065 100.482,25.629 D3.1@99.212,25.629 D3.1@99.187,25.654
  Bottom Layer w0.3: v1(98.159,25.654) 98.159,16.268 101.854,12.573 v1(102.108,12.573) ; K2.4@114.927,22.952 110.271,22.952 110.236,22.987 ; K4.4@114.927,62.357 114.927,59.936 110.236,55.245 110.236,42.799 ; K3.4@114.944,42.909 K3.4@114.927,42.891 110.328,42.891 110.236,42.799 ; K1.4@115.177,3.521 113.028,3.521 110.236,6.313 110.236,22.987 ; 110.236,22.987 110.236,42.799
pads on no net: D1.1 D1.2 D5.1 D5.2 D6.1 D6.2 D8.1 D8.2 D9.1 D9.2 D17.1 J1.1 J1.4 J1.6 J1.7 J1.8 J1.9 J1.10 J1.11 LCD1.0 P12.5 P12.7 P12.8 S7.2 seg_mux1.9 U1.7 U1.8 U1.9 U1.10 U2.1 U2.3 U3.1 U10.9
copper on no net: | length 7.7
  Top Layer w0.2: 43.205,88.163 43.205,89.941 43.79,90.526 43.79,92.329 ; 43.79,96.52 43.79,99.797

## Keep-outs
Keep-Out Layer:
  lines w0.2: 139.827,161.163 140,161.336 ; 140,161.336 -0.081,161.336 0,161.255 0,160 0,0 140,0 140,161.336

## Other copper
Top Layer:
  rectangle net GND: 60.96,64.135 69.088,72.263
  region net GND: 57.404,77.724 57.912,78.232 57.99,78.232 57.99,77.294 57.912,77.216
  region: 44.577,99.314
  region net NetBT1_1: 43.307,99.822 44.323,99.822 43.815,99.314
Bottom Layer:
  rectangle net GND: 60.96,64.135 69.088,72.263
  region net GND: 60.96,64.262
  region net 5V0: 72.263,74.93 58.293,74.93 58.293,61.468 72.263,61.468 72.263,70.485 70.104,70.485 70.104,63.373 60.071,63.373 60.071,73.025 72.263,73.025

## Text inside footprints (layer, text, board x,y; h text height)
BT1: Top Overlay "-" at 33.147,82.169 h7 r270; Top Overlay "+" at 33.147,95.631 h7 r270
C2: Top Overlay "+" at 77.165,19.329 h0.6 r270
C3: Top Overlay "+" at 75.209,25.07 h0.6 r180
C4: Top Overlay "+" at 68.986,25.07 h0.6 r180
C5: Top Overlay "+" at 64.44,17.755 h0.6 r90
C27: Top Overlay "+" at 103.175,87.986 h0.6 r90